# Altium PCB LED_pcb.PcbDoc
Units mm, origin at the board's own origin, x right, y up, seen from the top; angles counter-clockwise.
Board outline 75.18 x 72.26 mm, 2 copper layers (Top Layer, Bottom Layer); 19 components, 17 nets, 59 pads, 8 vias.
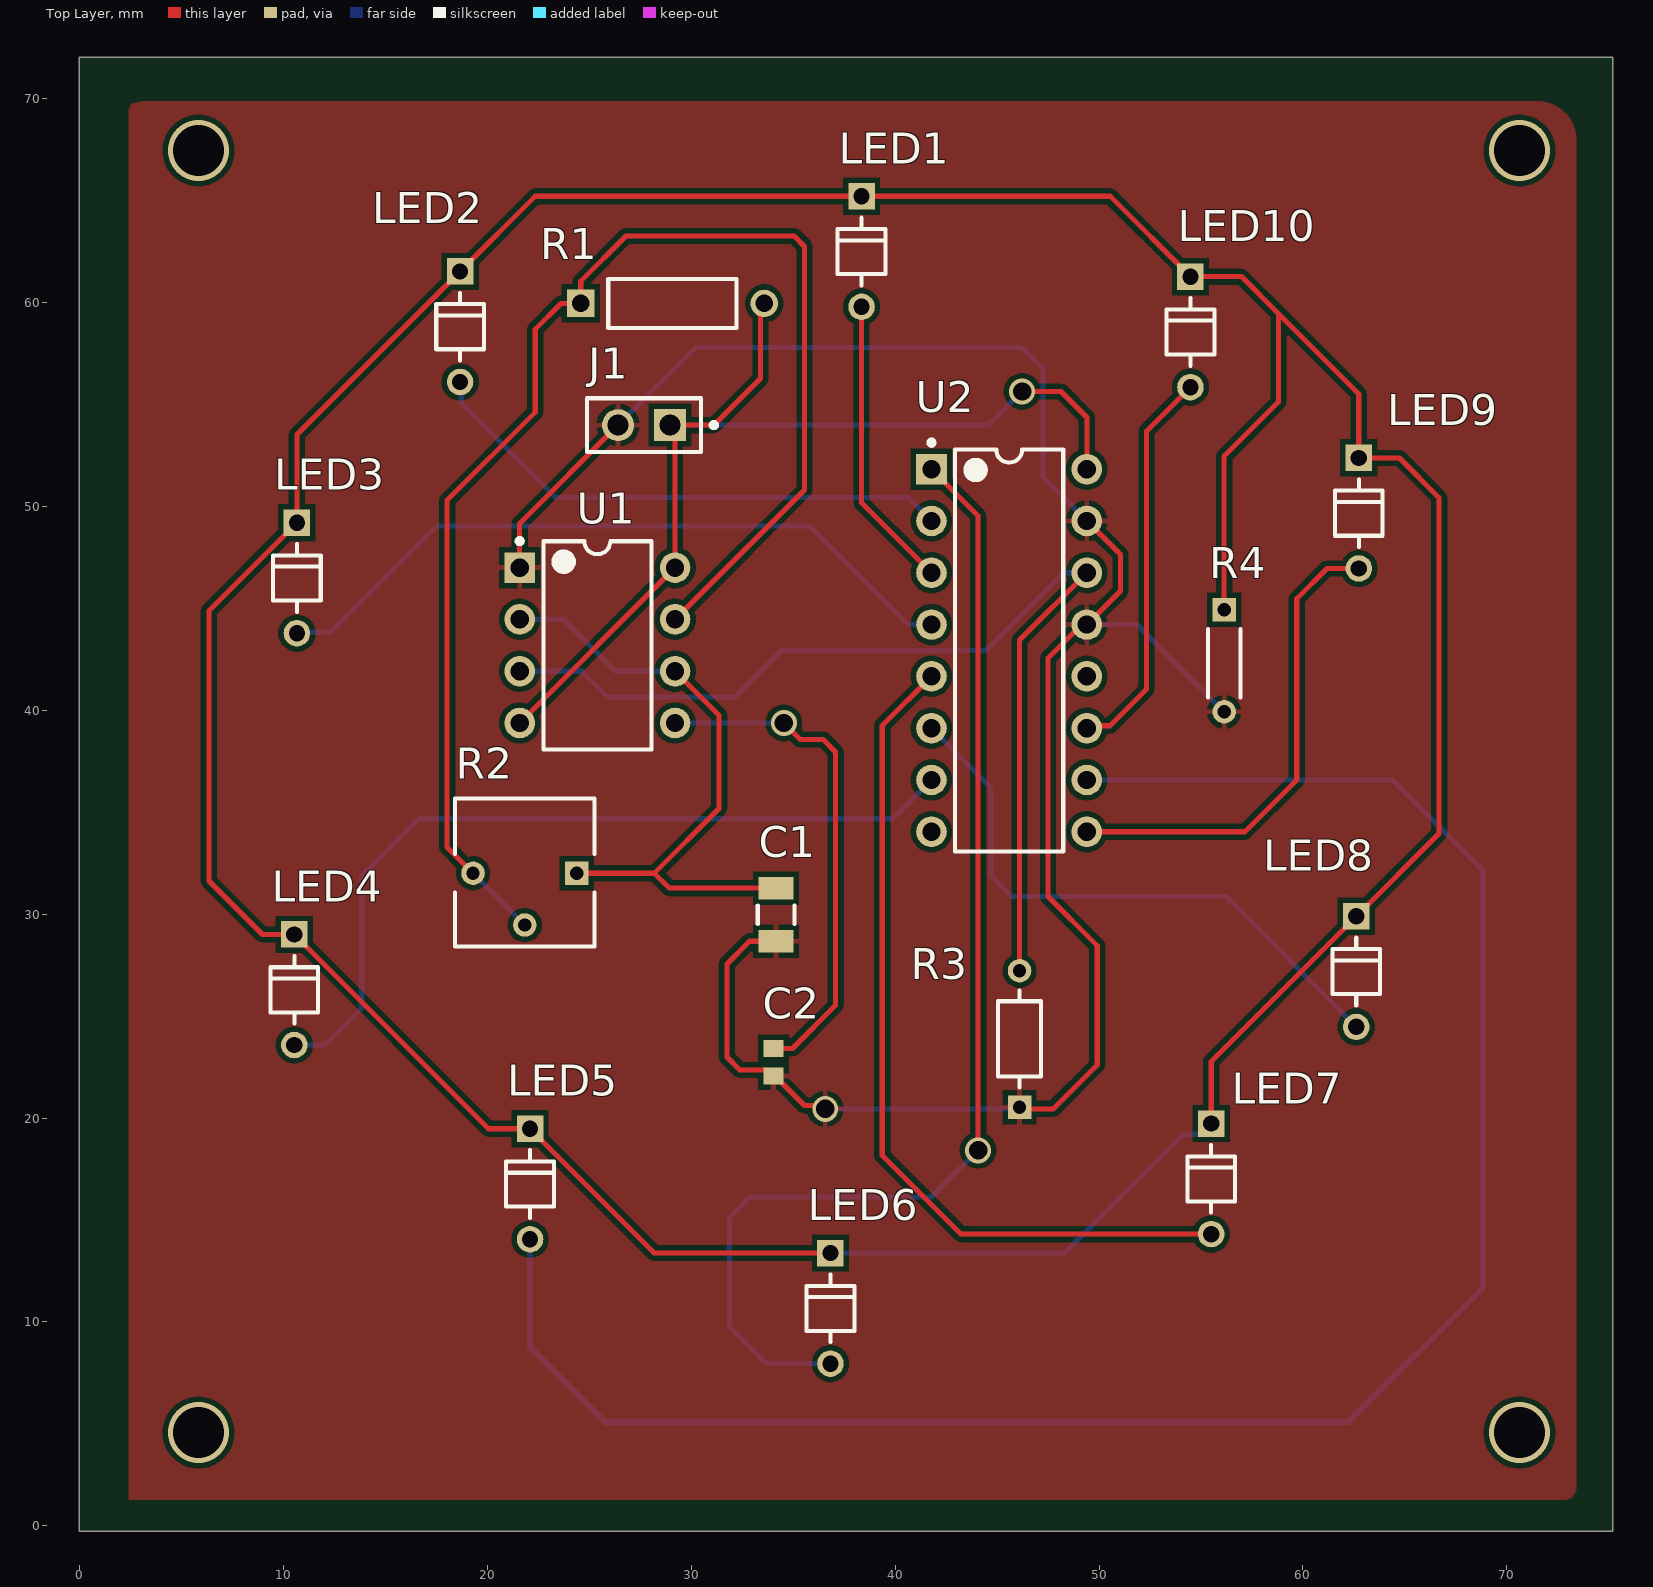
[diagram p0: Top Layer view]
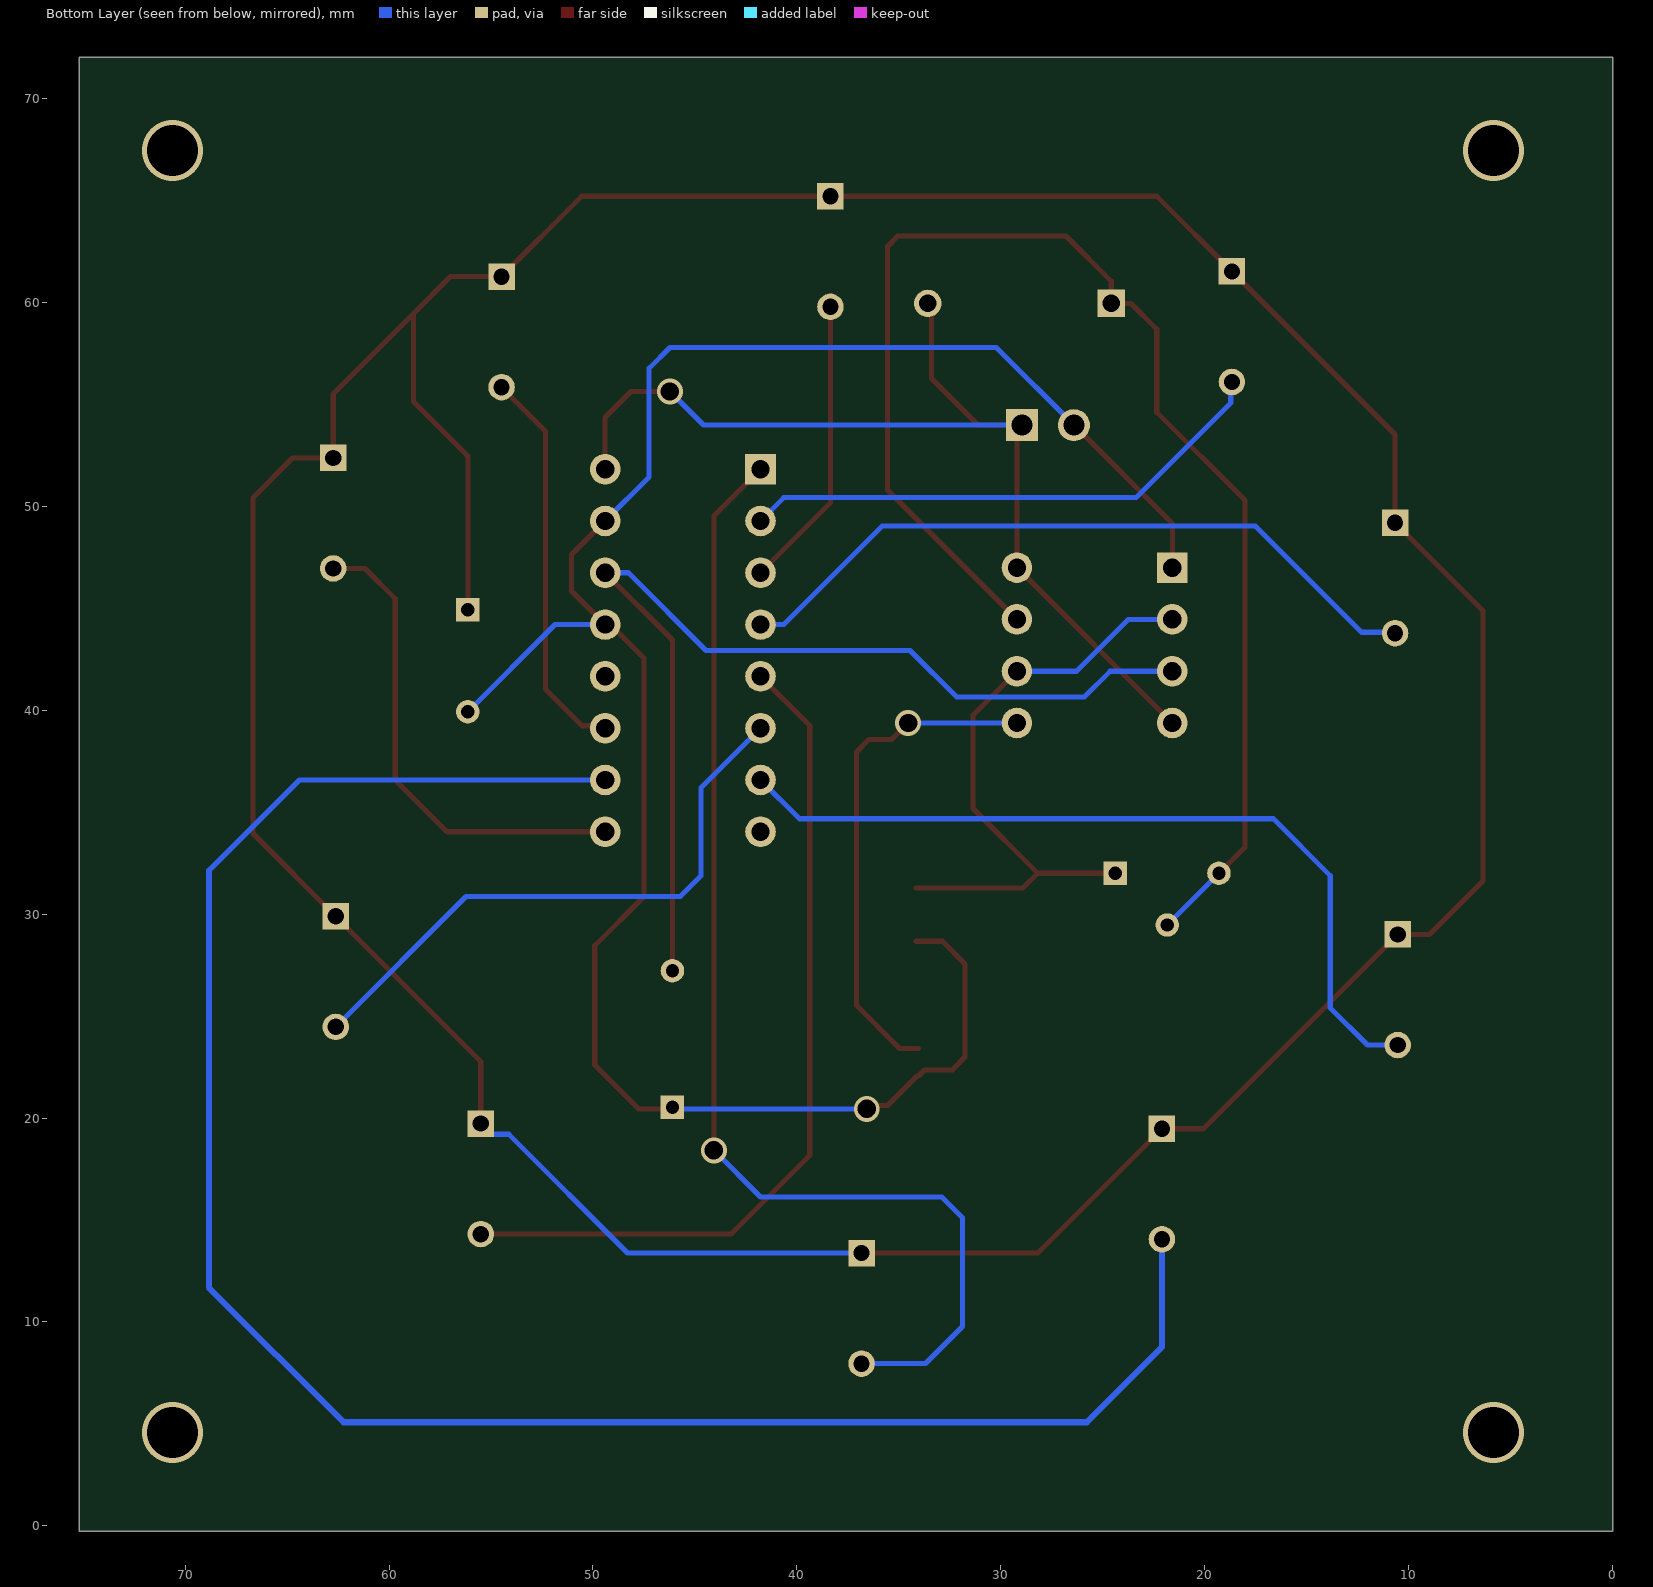
[diagram p1: Bottom Layer view, seen from below]
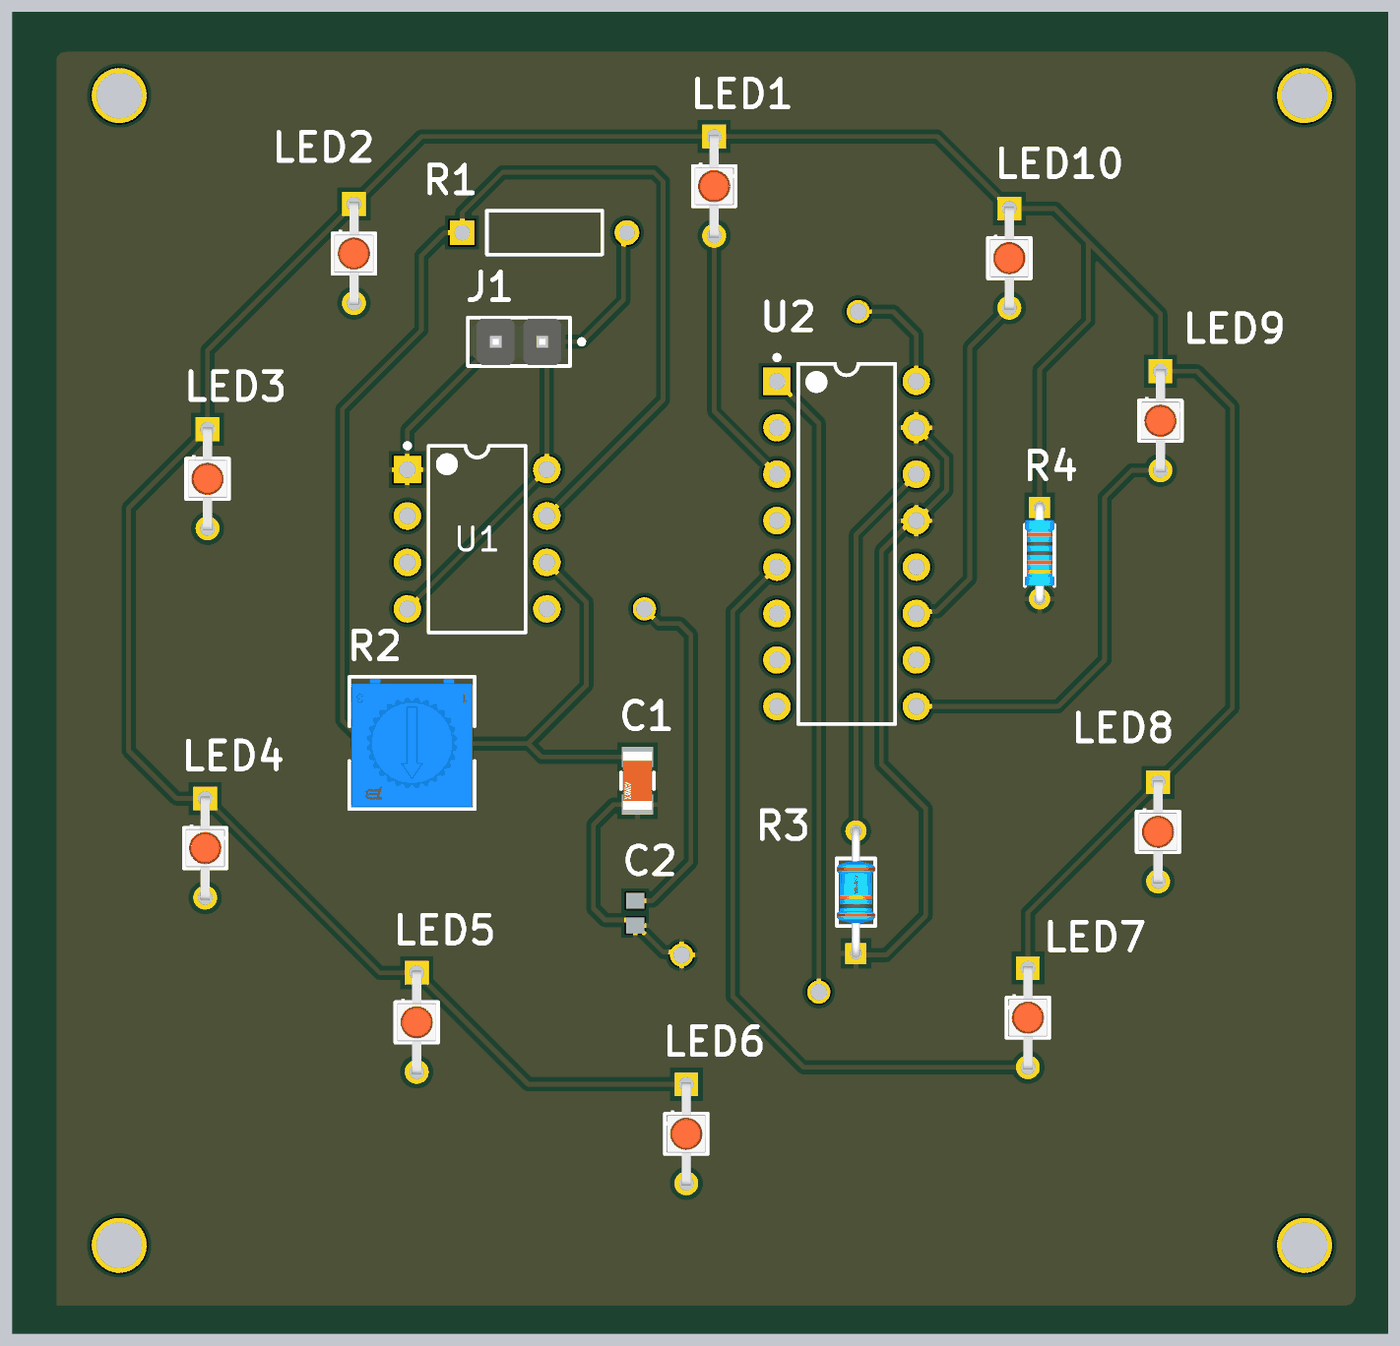
[diagram p2: 3D render of the assembled board from above, using the file's embedded part models]

## Layer stack, top to bottom
Top Solder: solder mask 0.0102, Solder Resist, Dk 3.5
Top Layer: signal copper 0.0356
Dielectric 1: dielectric 0.32, FR-4, Dk 4.8
Bottom Layer: signal copper 0.0356
Bottom Solder: solder mask 0.0102, Solder Resist, Dk 3.5

## Board outline
0,-0.254 75.184,-0.254 75.184,72.009 0,72.009

## Design rules (kind name [scope] priority, off if disabled: settings)
Clearance [All] p1: gap=0.254 ignorepadtopadclearanceinfootprint=FALSE except(0: Arc-Hole Track-Hole SMDPad-Hole THPad-Hole Via-Hole Fill-Hole Poly-Hole Region-Hole Text-Hole)
PolygonConnect [All] p1: connectstyle=Relief reliefconductorwidth=0.254 reliefentries=4 polygonreliefangle="90 Angle" airgapwidth=0.254
RoutingVias [All] p1: holewidth=0.711 width=1.27 viastyle="Through Hole" minholewidth=0.711 minwidth=1.27 maxholewidth=0.711 maxwidth=1.27
SilkToSolderMaskClearance [IsPad] p1: minsilkscreentomaskgap=0.2 clearancetoexposedcopper=TRUE
SolderMaskExpansion [All] p1: expansion=0.102 istentingtop=FALSE
Width [All] p1: maxlimit=0.35 minlimit=0.254 preferedwidth=0.254 minimp=50.000000 maximp=50.000000 favimp=50.000000
29 further rules are at their usual default settings.

## Components (designator, comment, footprint, x,y, rotation, side; value= is the part's Value field where it differs from the comment)
C1 "22u" FP-1206-L_3_2_0_2-W_1_6_0-IPC_C 34.163,29.972 r270 top
C2 "10n" CAPC1608X92X38NL15T08 34.036,22.733 r90 top
J1 "M20-9990246" FP-M20-9990246-MFG 27.686,53.975 r180 top
LED1 "HLMP-P156-HK011" FP-HLMP-P156-HK011-MFG 38.354,62.484 r270 top
LED2 "HLMP-P156-HK011" FP-HLMP-P156-HK011-MFG 18.669,58.801 r270 top
LED3 "HLMP-P156-HK011" FP-HLMP-P156-HK011-MFG 10.668,46.482 r270 top
LED4 "HLMP-P156-HK011" FP-HLMP-P156-HK011-MFG 10.541,26.289 r270 top
LED5 "HLMP-P156-HK011" FP-HLMP-P156-HK011-MFG 22.098,16.764 r270 top
LED6 "HLMP-P156-HK011" FP-HLMP-P156-HK011-MFG 36.83,10.668 r270 top
LED7 "HLMP-P156-HK011" FP-HLMP-P156-HK011-MFG 55.499,17.018 r270 top
LED8 "HLMP-P156-HK011" FP-HLMP-P156-HK011-MFG 62.611,27.178 r270 top
LED9 "HLMP-P156-HK011" FP-HLMP-P156-HK011-MFG 62.738,49.657 r270 top
LED10 "HLMP-P156-HK011" FP-HLMP-P156-HK011-MFG 54.483,58.547 r270 top
R1 "1M" RESA60-630X240 29.083,59.944 r0 top
R2 "50k" FP-3362P-1-503TLF-MFG 21.844,32.039 r180 top
R3 "10K" FP-MFR-12-MFG 46.101,23.876 r90 top
R4 "120" FP-MRS1600-MFG 56.134,42.418 r270 top
U1 "NE555P" P0008A 25.4,43.18 r0 top
U2 "CD74HC4017E" N0016A 45.593,42.926 r0 top

## Footprints (in the part's own frame and the unit in brackets; to place one, negate y for a bottom-side part, rotate by r counter-clockwise, add the part's x,y. Pads: shape width x height; smd on the part's side, far side on the other; paste and mask are expansions set on the pad)
CAPC1608X92X38NL15T08 [mm] "Chip Capacitor, 2-Leads, Body 1.60x0.80mm, IPC Medium Density"
  rect 0.85x1 smd: 1(-0.675,0) 2(0.675,0)
  body extent -0.87,-0.48 0.87,0.47, height 0.92
FP-1206-L_3_2_0_2-W_1_6_0-IPC_C [mm]
  rect 1.105x1.706 smd paste+0 mask+0: 1(-1.301,0) 2(1.301,0)
  silkscreen extent -0.45,-0.9 0.45,0.9, body extent -1.95,-1 1.95,1, height 0.25
FP-3362P-1-503TLF-MFG [mm]
  rect 1.15x1.15 hole 0.65 paste-1000 mask+0: 1(-2.54,0.035)
  round 1.15 hole 0.65 paste-1000 mask+0: 2(0,2.575) 3(2.54,0.035)
  silkscreen extent -3.42,-3.62 3.42,3.62, body extent -3.52,-3.72 3.52,3.72, height 0.25
FP-HLMP-P156-HK011-MFG [mm]
  rect 1.3x1.3 hole 0.8 paste-1000 mask+0: 1(-2.71,0)
  round 1.3 hole 0.8 paste-1000 mask+0: 2(2.71,0)
  silkscreen extent -1.66,-1.17 1.66,1.17, body extent -3.46,-1.27 3.46,1.27, height 0.25
FP-M20-9990246-MFG [mm]
  rect 1.57x1.57 hole 1.02 paste-1000 mask+0: 1(-1.27,0)
  round 1.57 hole 1.02 paste-1000 mask+0: 2(1.27,0)
  silkscreen extent -3.55,-1.32 2.79,1.32, body extent -2.89,-1.42 2.89,1.42, height 0.25
FP-MFR-12-MFG [mm]
  rect 1.15x1.15 hole 0.65 paste-1000 mask+0: 1(-3.35,0)
  round 1.15 hole 0.65 paste-1000 mask+0: 2(3.35,0)
  silkscreen extent -2.37,-1.05 2.37,1.05, body extent -4.03,-1.15 4.03,1.15, height 0.25
FP-MRS1600-MFG [mm]
  rect 1.15x1.15 hole 0.65 paste-1000 mask+0: 1(-2.5,0)
  round 1.15 hole 0.65 paste-1000 mask+0: 2(2.5,0)
  silkscreen extent -1.55,-0.8 1.8,0.8, body extent -3.17,-0.9 3.17,0.9, height 0.25
N0016A [mm] "DIP, 16-Leads, Body 19.7x6.6mm, Pitch 2.54mm"
  rect 1.5x1.5 hole 0.9: 1(-3.81,8.89)
  round 1.5 hole 0.9: 2(-3.81,6.35) 3(-3.81,3.81) 4(-3.81,1.27) 5(-3.81,-1.27) 6(-3.81,-3.81) 7(-3.81,-6.35) 8(-3.81,-8.89) 9(3.81,-8.89) 10(3.81,-6.35) 11(3.81,-3.81) 12(3.81,-1.27) 13(3.81,1.27) 14(3.81,3.81) 15(3.81,6.35) 16(3.81,8.89)
  silkscreen extent -3.93,-9.85 2.65,10.31, body extent -3.95,-9.85 3.95,9.85, height 5.08
P0008A [mm] "DIP, 8-Leads, Body 10.15x6.6mm, Pitch 2.54mm"
  rect 1.5x1.5 hole 0.9: 1(-3.81,3.81)
  round 1.5 hole 0.9: 2(-3.81,1.27) 3(-3.81,-1.27) 4(-3.81,-3.81) 5(3.81,-3.81) 6(3.81,-1.27) 7(3.81,1.27) 8(3.81,3.81)
  silkscreen extent -3.93,-5.1 2.65,5.23, body extent -3.95,-5.07 3.95,5.07, height 5.08
RESA60-630X240 [mm] "Axial Resistor, 2-Leads, Dia 2.4mm, Body Length 6.3mm"
  rect 1.35x1.35 hole 0.85: 1(-4.5,0)
  round 1.35 hole 0.85: 2(4.5,0)
  silkscreen extent -3.15,-1.2 3.15,1.2, body extent -3.15,-1.2 3.15,1.2, height 2.4

## Part data
C1: library part CMP-04427-006376-1, "General Purpose Ceramic Capacitor, 1206, 22uF, 10%, X5R, 15%, 6.3V", Capacitance=22uF, Case Code (Imperial)=1206, Case Code (Metric)=3216, Dielectric=X5R, Dielectric Material=Ceramic, Insulation Resistance=100GR, Max Operating Temperature=85°C, Min Operating Temperature=-55°C, Package Quantity=1, Tolerance=10%, Voltage=6.3V, Case/Package=1206, Construction=Flat, Contact Plating=Tin, Depth=1.6mm, Dissipation Factor=5%, Height=0.07mm, Lead Free="Lead Free", Length=3.2mm, Mount="Surface Mount", Number of Pins=2, Packaging="Tape and Reel", Radiation Hardening=No, REACH SVHC="No SVHC", RoHS Compliant=Yes, Series=1206, Termination=SMD/SMT, Thickness=0.07inch, Voltage Rating=6.3V, Voltage Rating (DC)=6.3V, Width=1.6mm
C2: library part CMP-2006-01186-1, Manufacturer=Vitramon, Part Number=VJ0603Y103KXBAC
J1: library part CMP-15831-000009-1, "CONN HEADER VERT 2POS 2.54MM", Current Rating=3A, Manufacturer=Harwin, Temperature="-40°C to +105°C", Temperature Range High=+105°C, Temperature Range Low=-40°C, Automotive=No, Category=Conn, ComponentLink2Description=Datasheet, ComponentLink2URL=https://cdn.harwin.com/pdfs/M20-999.pdf, Conn Gender=Male, Conn Orientation=Vertical, Contact Material=Tin,Nickel, Device Class L1=Connectors, Device Class L2="Headers and Wire Housings", Device Class L3=unset, Digikey Description="CONN HEADER VERT 2POS 2.54MM", Height=8.99mm, Lead Free=Yes, Manufacturer Part Number=M20-9990246, Mouser Description="2.54mm (0.1\") Pitch SIL Vertical PC Tail Pin Header, 6.1mm mating pin height, tin, 2 contacts", Number Of Contacts=2, Number Of Rows=1, Octopart=https://octopart.com/m20-9990246-harwin-2590635, Package=M20-9990246, Pitch=2.54mm, RoHS=TRUE
LED1 LED2 LED3 LED4 LED5 LED6 LED7 LED8 LED9 LED10: library part CMP-18399-000014-1, "LED RED CLEAR FLAT 2SMD GW", Colour=Red, Forward Current=0.5mA, Forward Voltage=1.7V, Manufacturer="Broadcom Limited", Max Junction Temp=+110°C, Power Dissipation=100mW, Reverse Voltage=5V, Temperature="-55°C to +100°C", Temperature Range High=+100°C, Temperature Range Low=-55°C, Automotive=No, Category=Diode, ComponentLink2Description=Datasheet, ComponentLink2URL=https://docs.broadcom.com/docs/AV02-3610EN, Device Class L1=Optoelectronics, Device Class L2=LEDs, Device Class L3=unset, Digikey Description="LED RED CLEAR FLAT 2SMD GW", Height=2.44mm, Ipc Land Pattern Name=DIOAD542W80L221D234, Lead Free=Yes, Led Orientation="Top View", Luminous Intensity=2.5mcd, Manufacturer Part Number=HLMP-P156-HK011, Octopart=https://octopart.com/hlmp-p156-hk011-broadcom-78782124, Package=HLMP-P156-HK011, Peak Emmision Wavelength=640nm, RoHS=TRUE, Viewing Angle=75°, Wavelength=630nm
R1: library part CMP-1659-00070-1, "Axial Resistor, 1 MOhm, +/- 1%, 250 mW, -55 to 155 degC, 2-Pin THD, RoHS, Bulk", Case\Package=Axial, Max Operating Temperature="155 degC", Min Operating Temperature="-55 degC", Package Quantity=200, Power Rating="250 mW", Resistance="47.5 kohm", Tolerance=1%, Voltage Rating="250 V", ComponentLink1Description="Manufacturer URL", ComponentLink1URL=http://www.yageo.com/, ComponentLink2Description=Datasheet, ComponentLink2URL=http://www.yageo.com/documents/recent/Yageo%20LR_MFR_2013.pdf, DatasheetVersion=Apr-13, Length="0.248 inch", Mount="Through Hole", PackageDescription="2-Pin Axial Lead, Dia 2.4 mm, Body Length 6.3 mm", PackageReference=MFR-25, Packaging=Bulk, RoHSCompliant=true
R2: library part CMP-07234-000028-1, "TRIMMER 50K OHM 0.5W PC PIN TOP", Max Operating Temperature=125°C, Max Power Dissipation=500mW, Min Operating Temperature=-55°C, Package Quantity=50, Resistance=50kR, Resistance Tolerance=10%, Resistor Type=Cermet, Temperature Coefficient=100ppm/°C, Voltage Rating (DC)=300V, Depth=7.04mm, Height=0.185inch, Lead Free="Lead Free", Length=6.6mm, Military Standard=Not, Mount="Through Hole", Number of Turns=1, Packaging=Rail/Tube, Power Rating=500mW, Radiation Hardening=No, REACH SVHC="No SVHC", RoHS Compliant=Yes, Series="Trimpot® 3362 - Sealed", Technology=CERMET, Termination=Pin, Tolerance=10%, Weight=0.02oz, Width=4.7mm
R3: library part CMP-03413-000012-1, "RES MF 1/6W 1% AXIAL", Max Operating Temperature=155°C, Min Operating Temperature=-55°C, Power Rating=160mW, Resistance=10kR, Tolerance=1%, Voltage Rating=200V, Packaging="Ammo Pack", Termination=Axial, Voltage Rating (DC)=200V
R4: library part CMP-02408-000036-1, "RES 120 OHM 1% 0.4W AXIAL", Case/Package=Conformal, Max Operating Temperature=155°C, Min Operating Temperature=-55°C, Power Rating=400mW, Resistance=120R, Resistor Type="Thin Film", Temperature Coefficient=50ppm/°C, Tolerance=1%, Construction=Cylindrical, Contact Plating=Tin, Diameter=1.6mm, Lead Free="Lead Free", Length=3.6mm, Military Standard=Not, Mount="Through Hole", Radiation Hardening=No, RoHS Compliant=Yes, Series=MRS16, Technology="THIN FILM", Termination=Axial, Width=1.6mm
U1: library part CMP-2000-04954-1, "Precision Timer, 4.5 to 16 V, 0 to 70 degC, 8-Pin DIP, Pb-Free, Tube", Manufacturer=TexasInstruments, Maximum High Level Output Current=-200mA, Maximum Low Level Output Current=200mA, Operating Supply Voltage=5, Package=8PDIP, Package Description="8-Pin Double In-line Package, Body 9.59 x 6.35 mm, Pitch 2.54 mm", Package Reference=P8, Category=Timer, Datasheet URL=http://www.ti.com/general/docs/lit/getliterature.tsp?genericPartNumber=NE555&fileType=pdf, Datasheet Version="Rev. I, 09/2014", Manufacturer URL=http://www.ti.com/, Number of Internal Timers=1, Package URL=http://www.ti.com/lit/ml/mpdi001b/mpdi001b.pdf, Packaging=Rail/Tube, Rad Hard=No, Type=Standard
U2: library part CMP-1623-00548-2, "High Speed CMOS Logic Decade Counter/Divider with 10 Decoded Outputs, N0016A, TUBE", F @ Nom Voltage(Max)(Mhz)=28, Generic Part Number=CD74HC4017, ICC @ Nom Voltage(Max)(mA)=0.08, Manufacturer="Texas Instruments", Operating Temperature Range(C)="-55 to 125", Rating=Catalog, tpd @ Nom Voltage(Max)(ns)=54, Voltage(Nom)(V)=3.3,5, Bits(#)=10, Code_JEDEC=MS-001, DatasheetVersion=SCHS200D, Function=Counter, Input Type=LVTTL/CMOS, Inputs=1, Output Drive (IOL/IOH)(Max)(mA)=5.2/-5.2, Output Type=CMOS, PackageReference=N0016A, Schmitt Trigger=No, Technology Family=HC, Type=Decade, VCC(Max)(V)=6, VCC(Min)(V)=2

## Via types
v1: diameter 3, hole 2.5, Top Layer to Bottom Layer, 4 vias
v2: diameter 1.27, hole 0.9, Top Layer to Bottom Layer, 4 vias

## Nets (pads, with @x,y where several pads share a name; then routed paths per layer and width w, separated by ;. In a path a pad name is that pad's centre, name@x,y a point inside that pad or via, vN(x,y) a via of type N, cw(c..) or ccw(c..) an arc to the next point about the centre after c; other vN are vias at no path point)
GND: C1.2 C2.1 J1.2 R3.1 R4.2 U1.1 U2.13 U2.15 | length 106.3
  Top Layer w0.254: U1.1 21.59,49.149 J1.2 ; C1.2 32.862,28.671 31.75,27.559 31.75,22.987 32.381,22.356 33.738,22.356 C2.1 34.111,22.058 35.56,20.609 36.414,20.609 v2(36.576,20.447) ; R3.1 46.18,20.447 47.752,20.447 49.911,22.606 49.911,28.448 47.498,30.861 47.498,42.545 49.149,44.196 U2.13 51.054,45.847 51.054,47.625 U2.15
  Bottom Layer w0.254: J1.2 30.226,57.785 46.228,57.785 47.244,56.769 47.244,51.435 U2.15 ; v2(36.576,20.447) 46.022,20.447 R3.1 ; U2.13 51.856,44.196 R4.2
NetC1_1: C1.1 R2.1 U1.2 U1.6 | length 30.9
  Top Layer w0.254: R2.1 28.194,32.004 ; U1.6 31.369,39.751 31.369,35.179 28.194,32.004 ; C1.1 28.925,31.273 28.194,32.004
  Bottom Layer w0.254: U1.2 23.749,44.45 26.289,41.91 U1.6
NetC2_2: C2.2 U1.5 | length 24.8
  Top Layer w0.254: C2.2 34.965,23.408 37.084,25.527 37.084,37.951 36.472,38.563 35.351,38.563 v2(34.544,39.37)
  Bottom Layer w0.254: U1.5 v2(34.544,39.37)
NetLED1_1: LED1.1 LED2.1 LED3.1 LED4.1 LED5.1 LED6.1 LED7.1 LED8.1 LED9.1 LED10.1 R4.1 | length 202.8
  Top Layer w0.254: LED6.1 28.194,13.378 LED5.1 20.066,19.474 LED4.1 8.974,28.999 6.35,31.623 6.35,44.874 LED3.1 10.668,53.51 LED2.1 22.352,65.194 LED1.1 50.546,65.194 LED10.1 56.98,61.257 58.801,59.436 ; LED7.1 55.499,22.776 LED8.1 66.675,33.952 66.675,50.419 64.727,52.367 LED9.1 62.738,55.499 58.801,59.436 ; R4.1 56.134,52.451 58.801,55.118 58.801,59.436
  Bottom Layer w0.254: LED6.1 48.303,13.378 54.13,19.205 54.976,19.205 LED7.1
NetLED1_2: LED1.2 U2.3 | length 14.5
  Top Layer w0.254: LED1.2 38.354,50.165 U2.3
NetLED2_2: LED2.2 U2.2 | length 26.5
  Bottom Layer w0.254: LED2.2 18.727,56.032 18.727,55.06 23.368,50.419 40.64,50.419 U2.2
NetLED3_2: LED3.2 U2.4 | length 35.5
  Top Layer w0.254: U2.4@41.668,44.311 U2.4
  Bottom Layer w0.254: LED3.2 10.711,43.815 12.319,43.815 17.526,49.022 35.814,49.022 40.64,44.196 U2.4
NetLED4_2: LED4.2 U2.7 | length 40.4
  Bottom Layer w0.254: LED4.2 12.022,23.579 13.843,25.4 13.843,31.877 16.637,34.671 39.878,34.671 U2.7
NetLED5_2: LED5.2 U2.10 | length 98
  Bottom Layer w0.254: U2.10 64.389,36.576 68.834,32.131
  Bottom Layer w0.3: LED5.2 22.098,8.763 25.781,5.08 62.23,5.08 68.834,11.684 68.834,32.131
NetLED6_2: LED6.2 U2.1 | length 58.9
  Top Layer w0.254: U2.1 44.069,49.53 v2(44.069,18.415)
  Bottom Layer w0.254: LED6.2 33.698,7.958 31.877,9.779 31.877,15.113 32.893,16.129 41.783,16.129 v2(44.069,18.415)
NetLED7_2: LED7.2 U2.5 | length 42.2
  Top Layer w0.254: U2.5 39.37,39.243 39.37,18.161 43.223,14.308 LED7.2
NetLED8_2: LED8.2 U2.6 | length 29.4
  Bottom Layer w0.254: U2.6 44.704,36.195 44.704,31.877 45.72,30.861 56.218,30.861 LED8.2
NetLED9_2: LED9.2 U2.9 | length 23.9
  Top Layer w0.254: U2.9 57.15,34.036 59.69,36.576 59.69,45.466 61.171,46.947 LED9.2
NetLED10_2: LED10.2 U2.11 | length 19.4
  Top Layer w0.254: U2.11 49.518,39.231 50.534,39.231 52.324,41.021 52.324,53.678 LED10.2
NetR1_1: R1.1 R2.2 R2.3 U1.7 | length 69.4
  Top Layer w0.254: R2.3 18.034,33.274 18.034,50.292 22.352,54.61 22.352,58.674 23.622,59.944 R1.1 24.583,61.032 26.797,63.246 35.052,63.246 35.56,62.738 35.56,50.8 U1.7
  Bottom Layer w0.254: R2.3 R2.2
NetR3_2: R3.2 U1.3 U2.14 | length 51.9
  Top Layer w0.254: R3.2 46.101,43.434 U2.14
  Bottom Layer w0.254: U1.3 24.638,41.91 25.908,40.64 32.164,40.64 34.45,42.926 44.45,42.926 48.26,46.736 U2.14 ; R3.2 R3.2@46.204,27.329
VCC: J1.1 R1.2 U1.4 U1.8 U2.16 | length 51.2
  Top Layer w0.254: U1.4 U1.8 29.21,53.721 J1.1 31.115,53.975 33.401,56.261 33.401,59.762 R1.2 ; v2(46.228,55.626) 48.133,55.626 49.403,54.356 U2.16
  Bottom Layer w0.254: J1.1 44.577,53.975 v2(46.228,55.626)
pads on no net: U2.8 U2.12
copper on no net:
  other v1: 5.842,4.572 70.612,4.572 5.842,67.437 70.612,67.437

## Polygon pours and split planes (outlines as drawn)
GND on Top Layer "GND_pour" (solid, pour order 0): 2.413,69.723 cw(c2.72,69.416) 2.72,69.85 71.501,69.85 cw(c71.501,67.945) 73.406,67.945 73.406,1.905 cw(c72.771,1.905) 72.771,1.27 2.413,1.27 2.413,69.342 cw(c2.921,69.342) 2.921,69.85 3.048,69.85